# Altium PCB Motor endcap.PcbDoc
Units mm, origin at the board's own origin, x right, y up, seen from the top; angles counter-clockwise.
Board outline 131.19 x 27.69 mm, 2 copper layers (Top Layer, Bottom Layer); 18 components, 24 nets, 96 pads, 4 vias.
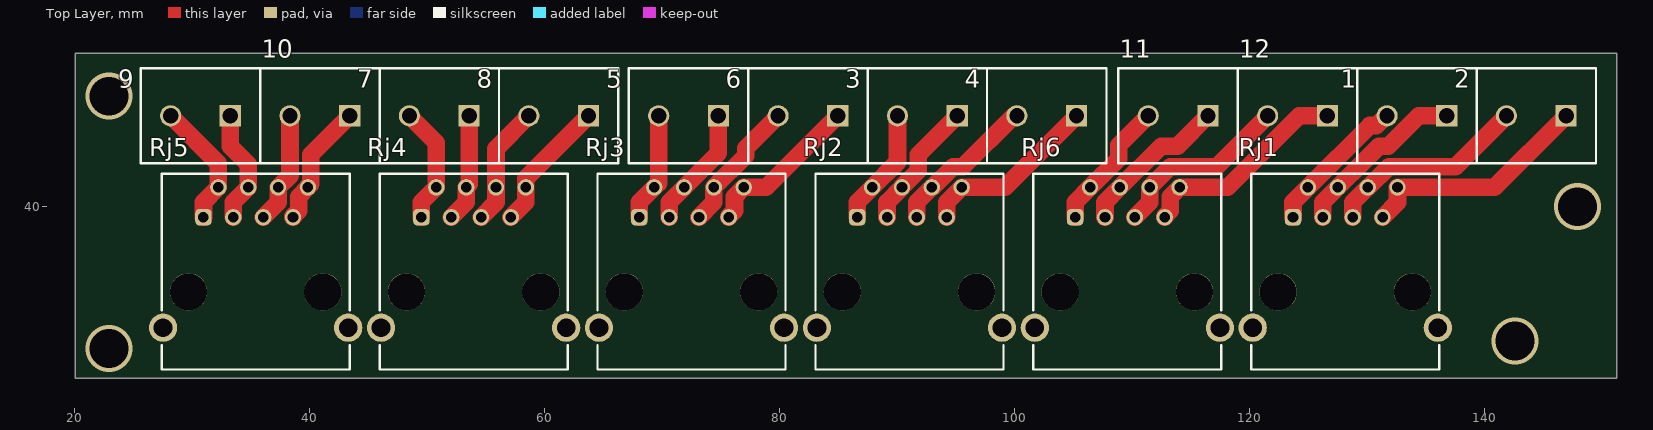
[diagram p0: Top Layer view]
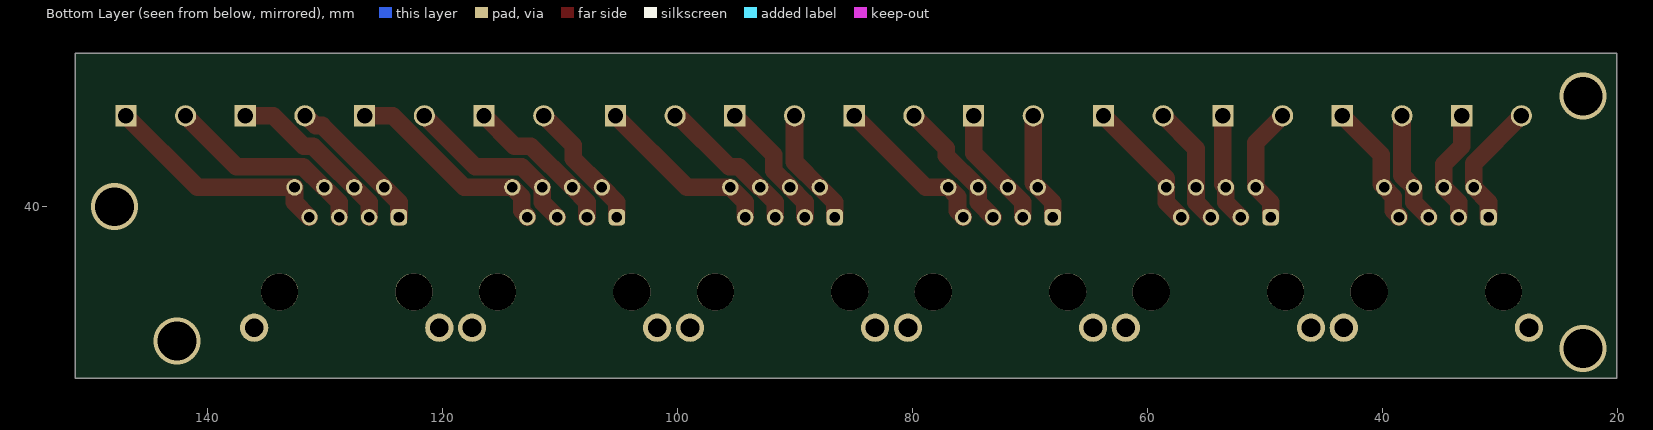
[diagram p1: Bottom Layer view, seen from below]
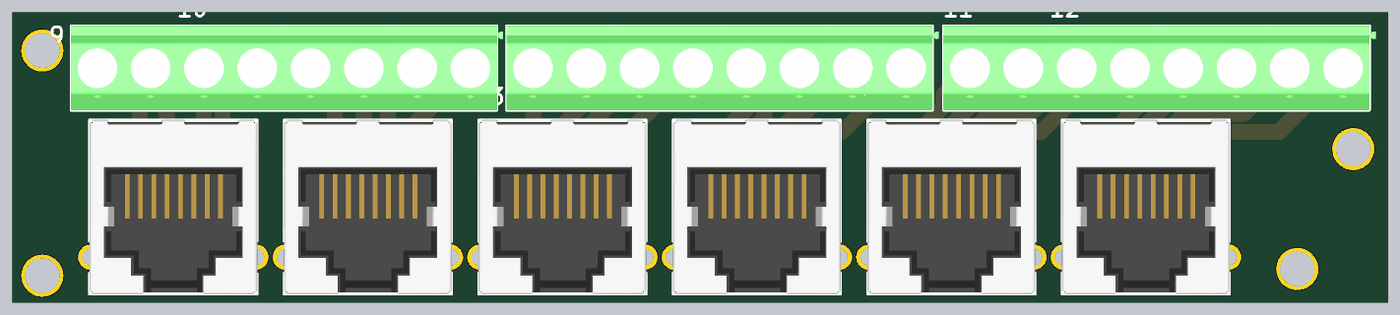
[diagram p2: 3D render of the assembled board from above, using the file's embedded part models]

## Layer stack, top to bottom
Top Solder: solder mask 0.0102, Solder Resist, Dk 3.5
Top Layer: signal copper 0.0356
Dielectric 1: dielectric 0.32, FR-4, Dk 4.8
Bottom Layer: signal copper 0.0356
Bottom Solder: solder mask 0.0102, Solder Resist, Dk 3.5

## Board outline
20.066,25.4 151.257,25.4 151.257,53.086 20.066,53.086

## Design rules (kind name [scope] priority, off if disabled: settings)
Clearance [All] p1: gap=0.254 ignorepadtopadclearanceinfootprint=FALSE
PolygonConnect [All] p1: connectstyle=Relief reliefconductorwidth=0.254 reliefentries=4 polygonreliefangle="90 Angle" airgapwidth=0.254
RoutingVias [All] p1: holewidth=0.711 width=1.27 viastyle="Through Hole" minholewidth=0.711 minwidth=1.27 maxholewidth=0.711 maxwidth=1.27
SolderMaskExpansion [All] p1: expansion=0.102 istentingtop=FALSE
Width [All] p1: maxlimit=1.5 minlimit=0.254 preferedwidth=1.5 toplayer_minwidth=1.5 bottomlayer_maxwidth=0.254 bottomlayer_prefwidth=0.254 minimp=50.000000 maximp=50.000000 favimp=50.000000
30 further rules are at their usual default settings.

## Components (designator, comment, footprint, x,y, rotation, side; value= is the part's Value field where it differs from the comment)
1 "1729128" PHOE-1729128-2_V 134.239,47.752 r180 top
2 "1729128" PHOE-1729128-2_V 144.399,47.752 r180 top
3 "1729128" PHOE-1729128-2_V 92.583,47.752 r180 top
4 "1729128" PHOE-1729128-2_V 102.743,47.752 r180 top
5 "1729128" PHOE-1729128-2_V 72.263,47.752 r180 top
6 "1729128" PHOE-1729128-2_V 82.423,47.752 r180 top
7 "1729128" PHOE-1729128-2_V 51.054,47.752 r180 top
8 "1729128" PHOE-1729128-2_V 61.214,47.752 r180 top
9 "1729128" PHOE-1729128-2_V 30.734,47.752 r180 top
10 "1729128" PHOE-1729128-2_V 40.894,47.752 r180 top
11 "1729128" PHOE-1729128-2_V 113.919,47.752 r180 top
12 "1729128" PHOE-1729128-2_V 124.079,47.752 r180 top
Rj1 "615008138221" 615008138221 128.144,34.493 r0 top
Rj2 "615008138221" 615008138221 91.06,34.493 r0 top
Rj3 "615008138221" 615008138221 72.518,34.493 r0 top
Rj4 "615008138221" 615008138221 53.976,34.493 r0 top
Rj5 "615008138221" 615008138221 35.432,34.493 r0 top
Rj6 "615008138221" 615008138221 109.602,34.493 r0 top

## Footprints (in the part's own frame and the unit in brackets; to place one, negate y for a bottom-side part, rotate by r counter-clockwise, add the part's x,y. Pads: shape width x height; smd on the part's side, far side on the other; paste and mask are expansions set on the pad)
615008138221 [mm] "Modular Jack Vertical Shielded 8P8C Front Post"
  rrect50% 1.4x1.4 hole 0.9: 1(-4.445,4.625)
  round 1.4 hole 0.9: 2(-3.175,7.165) 3(-1.905,4.625) 4(-0.635,7.165) 5(0.635,4.625) 6(1.905,7.165) 7(3.175,4.625) 8(4.445,7.165)
  round 3.17 hole 3.17 unplated: M1(-5.715,-1.725) M2(5.715,-1.725)
  round 2.4 hole 1.6: Shell(-7.875,-4.775) Shell(7.875,-4.775)
  silkscreen extent -8,-8.32 8,8.32, body extent -8,-8.32 8,8.33, height 16.62
PHOE-1729128-2_V [mm] "Receptacle, 2-Leads, Body 8.1x10.16mm, Pitch 5.08mm"
  rect 1.8x1.8 hole 1.3: 1(-2.54,0)
  round 1.8 hole 1.3: 2(2.54,0)
  silkscreen extent -5.08,-4.05 5.08,4.05, body extent -5.65,-4.05 5.08,4.05, height 10.01

## Part data
1 2 3 4 5 6 7 8 9 10 11 12: library part CMP-2000-05815-1, "PCB Terminal Block, 13.5 A, 400 V, 2-Pin THD, RoHS, Bulk", Current Rating=13500mA, Manufacturer="Phoenix Contact", Package Description="2-Pin Through Hole Device, Body 8.1 x 10.16 mm, Pitch 5.08 mm", Package Reference=1729128-2, Package Version=03/2015, Voltage Rating=400V, Datasheet URL=https://datasheet.ciiva.com/16046/1729128-16046181.pdf, Datasheet Version=12/2013, Manufacturer URL=http://www.phoenixcontact.com/, Mounting Technology=ThroughHole, No. of Positions=2, No. of Rows=1, Orientation=Horizontal, Package URL=https://www.phoenixcontact.com/online/portal/pi/pxc/product_detail_page/!ut/p/b1/3VdJjqNKFDxLH8AFycySyWY2ozFsEPOMMQaDOX1XedGL_1Vdm5YXJleknhSKeBkvI6EA8ncAo3AYoDhBQGco6KN7VURTdemj9us_IEKEZo_YHiPAEWEFmDGOHMORkqKYCORBZxgL7ZoaZYcbFFUZ3fqxSY6GOuxydWUuHqz1ynmMFygu583Bob0Ewr6Sd_l-5m-kAueHiB0jpRwZwe58wwtkpxtMYd_LmGcDRU02dRNEyWt6Y2ti5pSyJ_reIkzIulrqApdnbT11V5jnCKbYNCvhEM1MCpPByat_X379-iThf08CI5GfOPqfBeS3BRoBOdD55AKVv0iLwCMq-2BrzXWSGRH7pUGD9uwXQjiph3xL0DKQwdGa0JImiIOmBNOestqgwTHSSs2oOep-78apyXQBvNi8ZLaFjvjWvcaUEBu0MC6Wbe-d6mB0FAebo2lUWinqYaZs5DAYzV0RP9yitUjnGJ0iI9xhZkT42OCQNUJJhkgWINNQLP2JFP6OpMg3JCVg70jqHT0lvKOnhHf0lPuOnnLf0VPuWx6_dxwUIvwk5WMkT0kLL1mh61l2yZVSzG3pYV_bqo-mj6uMKwKwdnnW8Jh5RTOJzMOA5c-eJDaZQw4mTMPH02PvS_ZAqNVjVTo2WyYLkwH_KU1mmmG5kjRhDqPXLwwVHvVOjCM60-fpXvTDfMGW1PVFVS1r4e4yVDk4ZdNbkUHvqPqQSeian4UD39fNKmachqdJ1NJbyk8rXT9mXTvPk3oE5meulKGgiruPJek-4I9hTT6G8ZLOyRSm2RRVbThERQad5OS28hdt4YW4vG0stgYYzsWsK4_7y6DZMjJSCqri1kyiZR5vD7pwIrNR7QwPHTcLTI5qT7eRlpHrdGiupYlqQDJ7zy_CND8fWWBoLRXxk1RVcXiBQwbTD4Xi7KL-FuO94t9xaqweXzH, Packing=Bulk, PartNumber=1729128, Pitch=5.08mm, RoHS=TRUE
Rj1 Rj2 Rj3 Rj4 Rj5 Rj6: library part CMP-1502-01731-2, Color=Black, Contact Resistance=20mΩ, Current Rating=1.5A, Insulation Resistance=500MΩ, Max Operating Temperature=85°C, Min Operating Temperature=-40°C, Operating Supply Voltage=120V, Voltage Rating=125V, Connector Type="RJ45, Socket", Contact Material=Copper, Contact Plating=Gold, Depth=16.4mm, Direction="User Selectable", Gender=Female, Height=16.65mm, Housing Material=PBT, Insulation Material=PBT, Length=16.65mm, Mount="Through Hole", NexarPartId=18818181, Number of Contacts=8, Number of Ports=1, Number of Positions=8, Number of Rows=1, Orientation=Vertical, REACH SVHC=Unknown, RoHS=Compliant, Shielding=Shielded, Termination="Through Hole", Width=15.9mm

## Via types
v1: diameter 4, hole 3.3, Top Layer to Bottom Layer, 4 vias

## Nets (pads, with @x,y where several pads share a name; then routed paths per layer and width w, separated by ;. In a path a pad name is that pad's centre, name@x,y a point inside that pad or via, vN(x,y) a via of type N, cw(c..) or ccw(c..) an arc to the next point about the centre after c; other vN are vias at no path point)
Net1_1: 1.1 Rj1.3 Rj1.4 | length 14.9
  Top Layer w1.5: Rj1.3 126.239,40.388 131.017,45.166 131.806,45.166 134.392,47.752 1.1
Net1_2: 1.2 Rj1.1 Rj1.2 | length 12.3
  Top Layer w1.5: Rj1.1 123.699,40.388 Rj1.2 130.231,46.92 130.786,46.92 131.618,47.752 1.2
Net2_1: 2.1 Rj1.7 Rj1.8 | length 19.9
  Top Layer w1.5: Rj1.7 132.589,40.388 Rj1.8 140.845,41.658 2.1
Net2_2: 2.2 Rj1.5 Rj1.6 | length 17.4
  Top Layer w1.5: Rj1.5 128.779,40.388 Rj1.6 130.108,41.658 131.862,43.412 137.519,43.412 2.2
Net3_1: 3.1 Rj2.3 Rj2.4 | length 11.1
  Top Layer w1.5: Rj2.3 89.155,40.388 Rj2.4 90.425,41.717 91.797,43.089 91.797,44.426 3.1
Net3_2: 3.2 Rj2.1 Rj2.2 | length 10.1
  Top Layer w1.5: Rj2.1 86.615,40.388 Rj2.2 90.043,43.816 3.2
Net4_1: 4.1 Rj2.7 Rj2.8 | length 15.4
  Top Layer w1.5: Rj2.7 94.235,40.388 Rj2.8 99.189,41.658 4.1
Net4_2: 4.2 Rj2.5 Rj2.6 | length 12.8
  Top Layer w1.5: Rj2.5 91.695,40.388 Rj2.6 93.024,41.658 94.778,43.412 95.609,43.412 99.892,47.695 100.146,47.695 4.2
Net5_1: 5.1 Rj3.3 Rj3.4 | length 10.4
  Top Layer w1.5: Rj3.3 70.613,40.388 Rj3.4 74.803,44.578 5.1
Net5_2: 5.2 Rj3.1 Rj3.2 | length 9.3
  Top Layer w1.5: Rj3.1 68.073,40.388 Rj3.2 69.723,42.038 5.2
Net6_1: 6.1 Rj3.7 Rj3.8 | length 13.6
  Top Layer w1.5: Rj3.7 75.693,39.177 76.177,39.661 76.177,40.872 Rj3.8 78.869,41.658 6.1
Net6_2: 6.2 Rj3.5 Rj3.6 | length 11.4
  Top Layer w1.5: Rj3.5 74.423,40.388 Rj3.6 77.124,44.359 77.124,44.993 6.2
Net7_1: 7.1 Rj4.3 Rj4.4 | length 9.3
  Top Layer w1.5: Rj4.3 53.341,40.388 Rj4.4 53.594,41.911 7.1
Net7_2: 7.2 Rj4.1 Rj4.2 | length 10.1
  Top Layer w1.5: 7.2 50.801,45.465 Rj4.2 49.531,40.388 Rj4.1
Net8_1: 8.1 Rj4.7 Rj4.8 | length 11.4
  Top Layer w1.5: Rj4.7 58.421,40.388 Rj4.8 58.421,42.419 8.1
Net8_2: 8.2 Rj4.5 Rj4.6 | length 10.3
  Top Layer w1.5: Rj4.5 55.881,40.388 Rj4.6 55.881,44.959 8.2
Net9_1: 9.1 Rj5.3 Rj5.4 | length 9.8
  Top Layer w1.5: 9.1 33.274,45.153 34.797,43.63 Rj5.4 33.527,40.388 Rj5.3
Net9_2: 9.2 Rj5.1 Rj5.2 | length 10.8
  Top Layer w1.5: 9.2 32.257,43.689 Rj5.2 30.987,40.388 Rj5.1
Net10_1: 10.1 Rj5.7 Rj5.8 | length 10.6
  Top Layer w1.5: Rj5.7 38.607,39.177 39.091,39.661 39.091,40.872 Rj5.8 39.877,41.717 40.108,41.948 40.108,44.426 10.1
Net10_2: 10.2 Rj5.5 Rj5.6 | length 9.6
  Top Layer w1.5: Rj5.5 37.337,40.388 Rj5.6 38.354,42.675 10.2
Net11_1: 11.1 Rj6.3 Rj6.4 | length 13.1
  Top Layer w1.5: Rj6.3 107.697,40.388 Rj6.4 112.475,45.166 113.873,45.166 11.1
Net11_2: 11.2 Rj6.1 Rj6.2 | length 11.2
  Top Layer w1.5: Rj6.1 105.157,40.388 Rj6.2 108.874,44.105 108.874,45.247 11.2
Net12_1: 12.1 Rj6.7 Rj6.8 | length 18.2
  Top Layer w1.5: Rj6.7 112.777,39.177 113.261,39.661 113.261,40.872 Rj6.8 118.138,41.658 124.232,47.752 12.1
Net12_2: 12.2 Rj6.5 Rj6.6 | length 15.6
  Top Layer w1.5: Rj6.5 111.507,40.388 Rj6.6 113.261,43.412 117.199,43.412 12.2
pads on no net: Rj1.M1 Rj1.M2 Rj1.Shell Rj2.M1 Rj2.M2 Rj2.Shell Rj3.M1 Rj3.M2 Rj3.Shell Rj4.M1 Rj4.M2 Rj4.Shell Rj5.M1 Rj5.M2 Rj5.Shell Rj6.M1 Rj6.M2 Rj6.Shell
copper on no net:
  other v1: 22.943,27.954 142.577,28.589 147.911,40.019 22.943,49.417